# Altium PCB MotorControlCircruit.PcbDoc
Units mm, origin at the board's own origin, x right, y up, seen from the top; angles counter-clockwise.
Board outline 113.16 x 83.19 mm, 2 copper layers (Top Layer, Bottom Layer); 11 components, 10 nets, 75 pads, 2 vias.
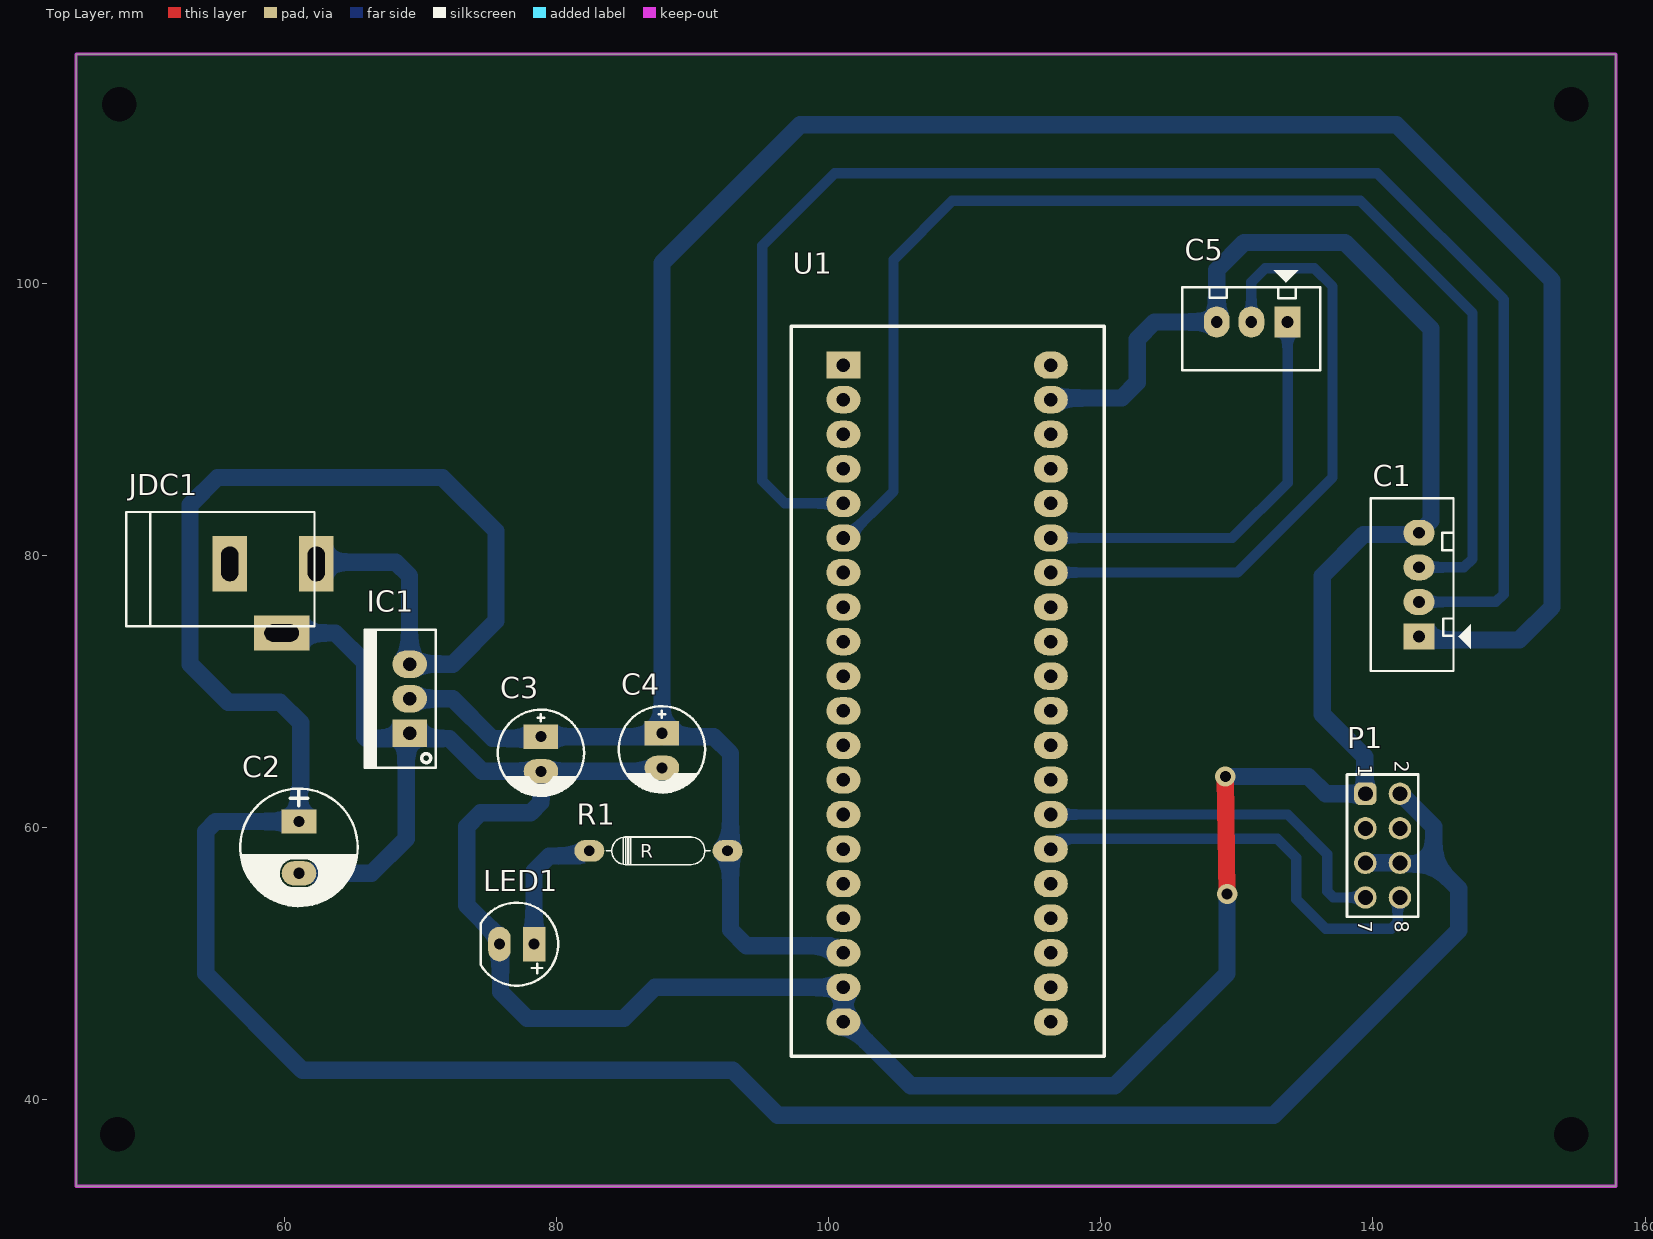
[diagram p0: Top Layer view]
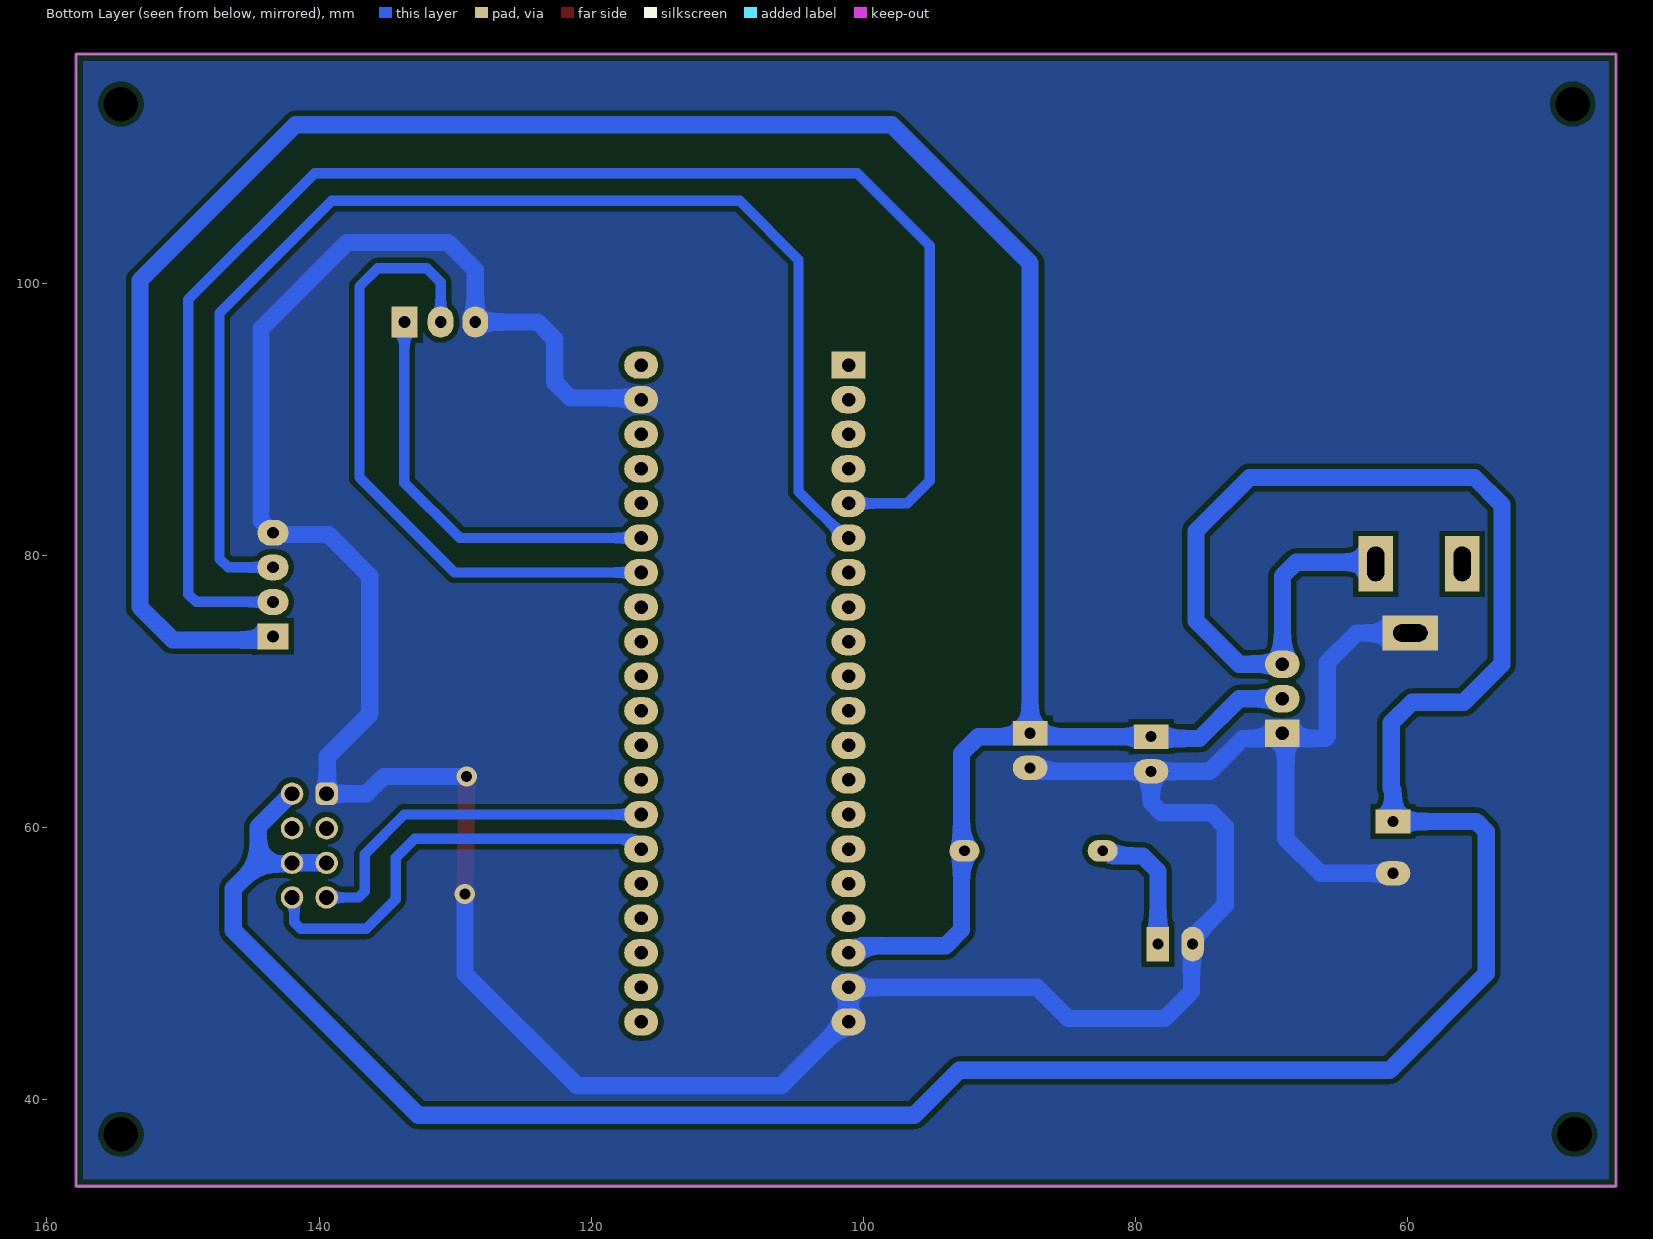
[diagram p1: Bottom Layer view, seen from below]
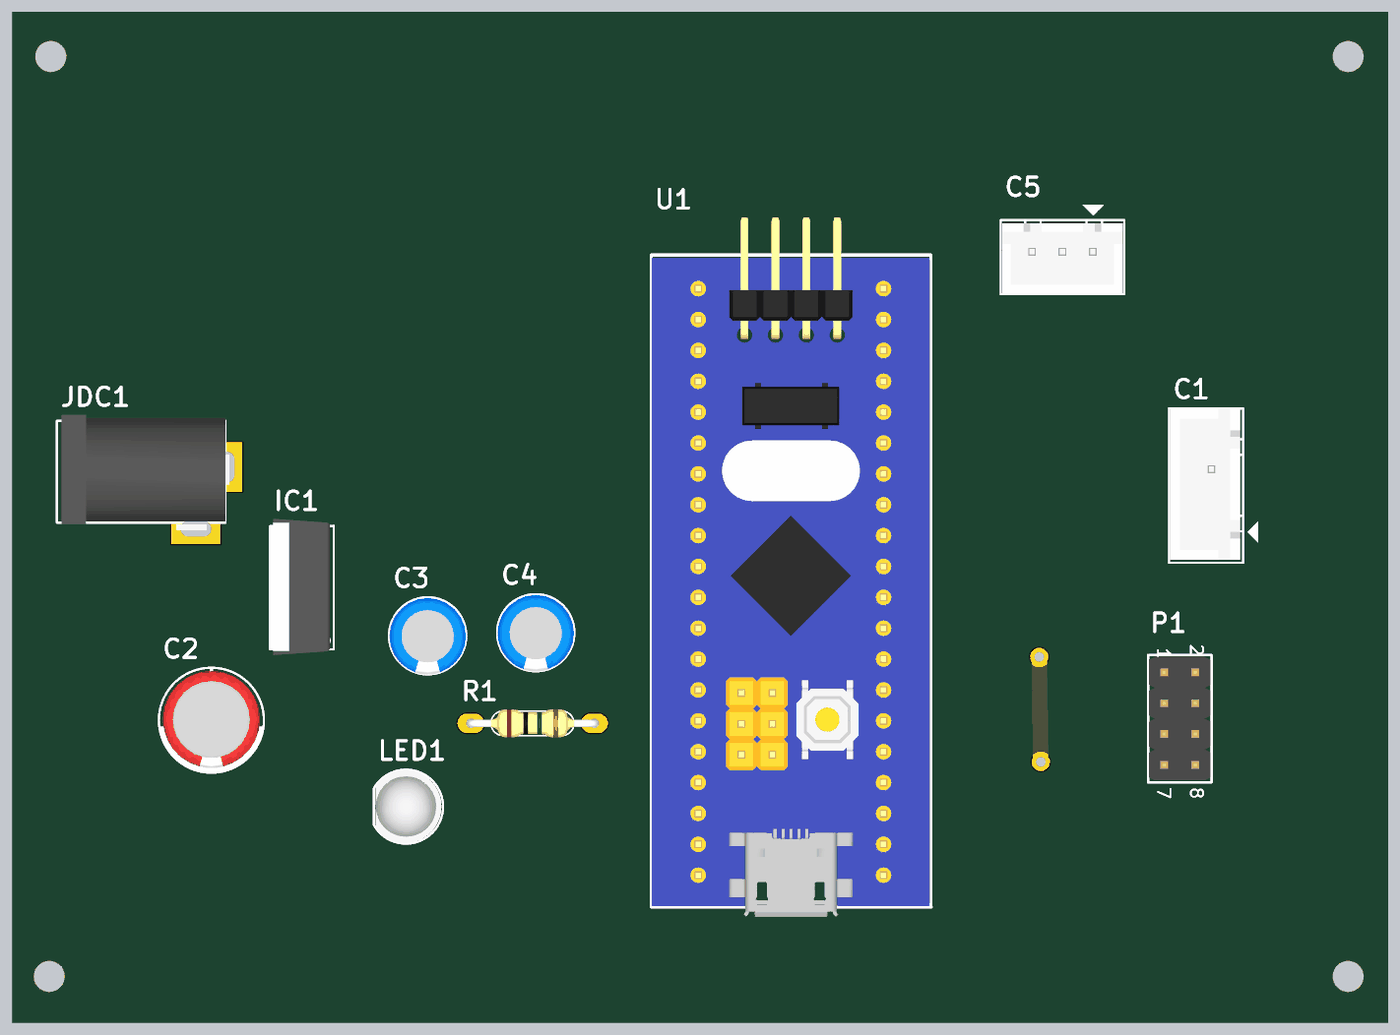
[diagram p2: 3D render of the assembled board from above, using the file's embedded part models]

## Layer stack, top to bottom
Top Solder: solder mask 0.0102, Solder Resist, Dk 3.5
Top Layer: signal copper 0.0356
Dielectric 1: dielectric 0.32, FR-4, Dk 4.8
Bottom Layer: signal copper 0.0356
Bottom Solder: solder mask 0.0102, Solder Resist, Dk 3.5

## Board outline
44.704,33.655 44.704,116.84 157.861,116.84 157.861,33.655

## Design rules (kind name [scope] priority, off if disabled: settings)
Clearance [All] p1: gap=0.381 ignorepadtopadclearanceinfootprint=FALSE
PolygonConnect [All] p1: connectstyle=Direct reliefconductorwidth=0.254 reliefentries=4 polygonreliefangle="90 Angle" airgapwidth=0.254
RoutingVias [All] p1: holewidth=0.8 width=1.5 viastyle="Through Hole" minholewidth=0.8 minwidth=1.5 maxholewidth=0.8 maxwidth=1.5
SolderMaskExpansion [All] p1: expansion=0.102
Width [All] p1: maxlimit=1.27 minlimit=0.508 preferedwidth=0.762
30 further rules are at their usual default settings.

## Components (designator, comment, footprint, x,y, rotation, side; value= is the part's Value field where it differs from the comment)
C1 "Header4" Header4 143.383,74.041 r90 top
C2 "Cap Pol" CP1.5/3.4 61.087,60.452 r270 top value=100uF
C3 "Cap Pol" CP1/2.5 78.867,66.675 r270 top value=10uF
C4 "Cap Pol" CP1/2.5 87.757,66.929 r270 top value=0.1uF
C5 "Header3" Header3 133.604,97.155 r180 top
IC1 "LM1117" QTO-220 69.215,66.929 r90 top value=LM317
JDC1 "Jack DC" DC-IN 59.182,76.835 r0 top value="Jac DC"
LED1 "LED" LED-5-RED 78.359,51.435 r180 top value="LED 3 ly Single Colour"
P1 "61300821121" 61300821121 140.716,58.674 r270 top
R1 "RESISTOR" "RES 1/4 W" 82.423,58.293 r0 top value=1K
U1 "Bluepill" "Blue Pill" 116.332,93.98 r180 top

## Footprints (in the part's own frame and the unit in brackets; to place one, negate y for a bottom-side part, rotate by r counter-clockwise, add the part's x,y. Pads: shape width x height; smd on the part's side, far side on the other; paste and mask are expansions set on the pad)
61300821121 [mm] "Pin Header, pitch 2.54 mm, THT, Vertical, dual row, 8p"
  rrect50% 1.65x1.65 hole 1.1: 1(-3.81,-1.27)
  round 1.65 hole 1.1: 2(-3.81,1.27) 3(-1.27,-1.27) 4(-1.27,1.27) 5(1.27,-1.27) 6(1.27,1.27) 7(3.81,-1.27) 8(3.81,1.27)
  silkscreen extent -5.23,-2.62 5.23,2.62, body extent -5.08,-2.54 5.08,2.54, height 8.59
"Blue Pill" [mm]
  oval 2.5x2 hole 1: 1(0,48.26) 2(0,45.72) 3(0,43.18) 4(0,40.64) 5(0,38.1) 6(0,35.56) 7(0,33.02) 8(0,30.48) 9(0,27.94) 10(0,25.4) 11(0,22.86) 12(0,20.32) 13(0,17.78) 14(0,15.24) 15(0,12.7) 16(0,10.16) 17(0,7.62) 18(0,5.08) 19(0,2.54) 20(0,0) 22(15.24,2.54) 23(15.24,5.08) 24(15.24,7.62) 25(15.24,10.16) 26(15.24,12.7) 27(15.24,15.24) 28(15.24,17.78) 29(15.24,20.32) 30(15.24,22.86) 31(15.24,25.4) 32(15.24,27.94) 33(15.24,30.48) 34(15.24,33.02) 35(15.24,35.56) 36(15.24,38.1) 37(15.24,40.64) 38(15.24,43.18) 39(15.24,45.72) 40(15.24,48.26)
  rect 2.5x2 hole 1: 21(15.24,0)
  silkscreen extent -3.94,-2.84 19.08,50.8, body extent -3.84,-5.95 19.02,51.61, height 12.31
CP1.5/3.4 [mil] "Tu hoa 220->470uF,16V, 470uF/16V,25V"
  rect 70x100 hole 32: 1(0,0)
  oval 70x100 hole 32: 2(150,0)
  silkscreen extent -95,-170 245,170, body extent -85,-157 230,157, height 446
CP1/2.5 [mil] "Tu hoa 33 >100 uF,50V, 220uF/16V,25V"
  rect 70x100 hole 32: 1(0,0)
  oval 70x100 hole 32: 2(100,0)
  silkscreen extent -78,-125 172,125, body extent -76,-124 172,124, height 422
DC-IN [mil] "Jac DC input"
  rect 100x160 hole 50 slot 100 at 90 deg: 1(125,100) 2(-125,100)
  rect 160x100 hole 50 slot 100 at 0 deg: 3(25,-100)
  silkscreen extent -425,-80 120,250, body extent -410,-105 134,269, height 434
Header3 [mil] "CON 3"
  rect 75x90 hole 34: 1(-5,0)
  oval 75x90 hole 34: 2(100,0) 3(200,0)
  silkscreen extent -100,-150 300,140, body extent -95,-90 295,136, height 276
Header4 [mil] "CON4"
  rect 75x90 hole 34: 1(0,0)
  oval 75x90 hole 34: 2(100,0) 3(200,0) 4(300,0)
  silkscreen extent -100,-150 400,140, body extent -90,-90 398,136, height 276
LED-5-RED [mil] "LED 2 PIN, 5 ly , Only colour,pin to pin 100mil"
  rect 65x100 hole 32: 1(0,0)
  oval 65x100 hole 32: 2(100,0)
  silkscreen extent -70,-120 154,120, body extent -65,-119 149,118, height 339
QTO-220 [mil] "TO-220 - 1-2-3"
  rect 80x100 hole 39: 1(0,0)
  oval 80x100 hole 39: 2(100,0) 3(200,0)
  silkscreen extent -100,-76 300,130, body extent -119,-64 322,121, height 755
"RES 1/4 W" [mm]
  oval 2.2x1.6 hole 0.787: 1(0,0) 2(10.16,0)
  silkscreen extent 1.26,-1.02 8.88,1.02, body extent -0.3,-1.16 10.46,1.16, height 2.93

## Part data
C1: "Header IDC, 4 x 1 Pin Vertical 2.54mm Pitch (Non-Boxed, Male)", Manufacturer="Würth Elektronik eiSos GmbH", partNo=613002143121, ComponentLink1 Description=Manufacturer, ComponentLink1URL=http://www.we-online.com, ComponentLink2 Description=Datasheet, ComponentLink2URL=http://katalog.we-online.de/em/datasheet/6130xx143121.pdf, Created by="Karrer Zheng", Created Date="29 March 2013", NoPins=02
C2 C3 C4: "Polarized Capacitor (Radial)"
C5: "Header IDC, 3 x 1 Pin Vertical 2.54mm Pitch (Non-Boxed, Male)", Manufacturer="Würth Elektronik eiSos GmbH", partNo=613002143121, ComponentLink1 Description=Manufacturer, ComponentLink1URL=http://www.we-online.com, ComponentLink2 Description=Datasheet, ComponentLink2URL=http://katalog.we-online.de/em/datasheet/6130xx143121.pdf, Created by="Karrer Zheng", Created Date="29 March 2013", NoPins=02
IC1: "Available in 1.8V, 2.5V, 2.85V, 3.3V, 5V, and  Adjustable Versions"
JDC1: "Jack DC input"
LED1: "LED Single colour Green and Red"
P1: "WR-PHD Pin Header, THT, Vertical, pitch 2.54mm, 2 Row, 8P", Contact Resistance=20mO, Manufacturer="Wurth Elektronik", Operating Temperature Max=105癈, Operating Temperature Min=-40癈, Rated Current=3A, Withstanding Voltage=500V, Working Voltage=250V, Category="Board-to-Board Connectors", ComponentLink1Description="Website Link", ComponentLink1URL=https://www.we-online.com/redexpert/article/61300821121?ad, ComponentLink2Description="Datasheet Link", ComponentLink2URL=https://www.we-online.com/redexpert/spec/61300821121?ad, Gender="Pin Header", Manufacturer Part Number=61300821121, Match Code=WR-PHD, Mount="Through Hole", Number of Pins=8, Number of Rows=2, Orientation=Vertical, Packaging=Bag, Pitch=2.54mm
R1: "Resistor"
U1: library part STM32F103C8T6, "STM32F103C8T6"

## Free pads (board coordinates)
  round 1.524 hole 2.54: 2(47.879,113.157) 3(154.559,113.157) 4(154.559,37.465) 5(47.752,37.465)

## Via types
v1: diameter 1.5, hole 0.8, Top Layer to Bottom Layer, 2 vias

## Nets (pads, with @x,y where several pads share a name; then routed paths per layer and width w, separated by ;. In a path a pad name is that pad's centre, name@x,y a point inside that pad or via, vN(x,y) a via of type N, cw(c..) or ccw(c..) an arc to the next point about the centre after c; other vN are vias at no path point)
3V3: C1.1 C3.1 C4.1 IC1.2 R1.2 U1.38 | length 191.5
  Bottom Layer w1.27: IC1.2 72.39,69.469 75.311,66.548 78.74,66.548 C3.1 87.503,66.675 C4.1 ; R1.2 R1.2@92.794,58.293 ; U1.38 100.644,50.8 100.12,51.324 93.964,51.324 92.794,52.494 R1.2@92.794,58.293 ; C1.1 143.637,73.787 150.749,73.787 153.162,76.2 153.162,100.203 141.732,111.633 97.917,111.633 87.757,101.473 C4.1 ; C4.1 88.011,66.675 91.567,66.675 92.794,65.448 R1.2@92.794,58.293
5V: C2.1 IC1.3 JDC1.1 P1.2 P1.5 P1.6 | length 218.3
  Bottom Layer w1.27: JDC1.1@62.484,79.502 68.199,79.502 69.215,78.486 IC1.3 72.39,72.009 75.565,75.184 75.565,81.788 71.628,85.725 55.1,85.725 53.086,83.711 53.086,72.009 55.88,69.215 59.69,69.215 61.214,67.691 61.214,62.865 61.087,62.738 C2.1 54.973,60.452 54.229,59.708 54.229,49.276 61.341,42.164 92.964,42.164 96.266,38.862 132.715,38.862 146.304,52.451 146.304,55.499 144.472,57.331 ; P1.5 P1.6 142.059,57.331 144.472,57.331 ; P1.2 142.05,62.484 144.472,60.062 144.472,57.331
GND: C1.4 C2.2 C3.2 C4.2 C5.3 IC1.1 JDC1.3 LED1.2 P1.1 U1.19 U1.39 U1.40 | length 242.4
  Top Layer w1.27: v1(129.159,63.754) v1(129.286,55.118)
  Bottom Layer w1.27: JDC1.3 63.754,74.295 65.913,72.136 65.913,66.675 66.04,66.548 68.834,66.548 IC1.1@68.961,66.675 ; C2.2 66.421,56.642 68.961,59.182 IC1.1@68.961,66.675 ; C3.2@78.486,64.135 74.549,64.135 72.136,66.548 69.596,66.548 IC1.1 IC1.1@68.961,66.675 ; C4.2 87.239,64.389 86.985,64.135 C3.2 78.867,61.849 78.105,61.087 74.422,61.087 73.406,60.071 73.406,54.292 75.819,51.88 LED1.2 75.892,51.362 75.892,47.933 77.851,45.974 84.963,45.974 87.249,48.26 U1.39 U1.40 101.342,45.72 106.041,41.021 121.031,41.021 129.286,49.276 v1(129.286,55.118) ; U1.19 116.459,91.567 121.539,91.567 122.682,92.71 122.682,95.885 123.952,97.155 C5.3 128.524,100.965 130.556,102.997 137.922,102.997 144.272,96.647 144.272,82.55 C1.4 143.261,81.539 139.324,81.539 136.271,78.486 136.271,68.326 139.395,65.202 139.395,62.535 P1.1 136.525,62.484 135.255,63.754 v1(129.159,63.754)
LPWM: P1.7 U1.7 | length 27.2
  Bottom Layer w0.762: U1.7 133.731,60.96 136.652,58.039 136.652,55.31 137.098,54.864 P1.7
NetLED1_1: LED1.1 R1.1 | length 10
  Bottom Layer w1.27: LED1.1 78.359,56.788 79.483,57.912 81.653,57.912 82.034,58.293 R1.1
RPWM: P1.8 U1.6 | length 32.4
  Bottom Layer w0.762: U1.6 117.094,59.182 132.969,59.182 134.366,57.785 134.366,54.737 136.525,52.578 141.351,52.578 141.816,53.043 141.816,54.694 P1.8
RX: C5.1 U1.15 | length 30.9
  Bottom Layer w0.762: U1.15 129.667,81.28 133.731,85.344 C5.1
TIM2_CH1: C1.2 U1.25 | length 112.6
  Bottom Layer w0.762: U1.25 96.774,83.82 95.123,85.471 95.123,102.743 100.457,108.077 140.335,108.077 149.606,98.806 149.606,77.154 149.033,76.581 C1.2
TIM2_CH2: C1.3 U1.26 | length 92.1
  Bottom Layer w0.762: U1.26 101.342,81.28 104.775,84.713 104.775,101.727 109.093,106.045 139.065,106.045 147.32,97.79 147.32,79.756 146.685,79.121 C1.3
TX: C5.2 U1.14 | length 47.5
  Bottom Layer w0.762: U1.14 130.048,78.74 137.033,85.725 137.033,99.757 135.698,101.092 132.08,101.092 131.064,100.076 C5.2
pads on no net: JDC1.2 P1.3 P1.4 U1.1 U1.2 U1.3 U1.4 U1.5 U1.8 U1.9 U1.10 U1.11 U1.12 U1.13 U1.16 U1.17 U1.18 U1.20 U1.21 U1.22 U1.23 U1.24 U1.27 U1.28 U1.29 U1.30 U1.31 U1.32 U1.33 U1.34 U1.35 U1.36 U1.37

## Polygon pours and split planes (outlines as drawn)
GND on Bottom Layer "Top Layer-No Net" (solid, remove dead copper, pour order 0): 44.704,33.655 44.704,116.84 157.861,116.84 157.861,33.655

## Keep-outs
Keep-Out Layer:
  the board outline again, w0.254

## Text inside footprints (layer, text, board x,y; h text height)
P1: Top Overlay "8" at 141.616,53.134 h1.02 r270; Top Overlay "7" at 138.916,53.134 h1.02 r270; Top Overlay "2" at 141.616,64.914 h1.02 r270; Top Overlay "1" at 138.916,64.614 h1.02 r270
R1: Top Overlay "R" at 86.169,57.772 h1